# EAGLE board wio_shield (EAGLE 7.6.0)
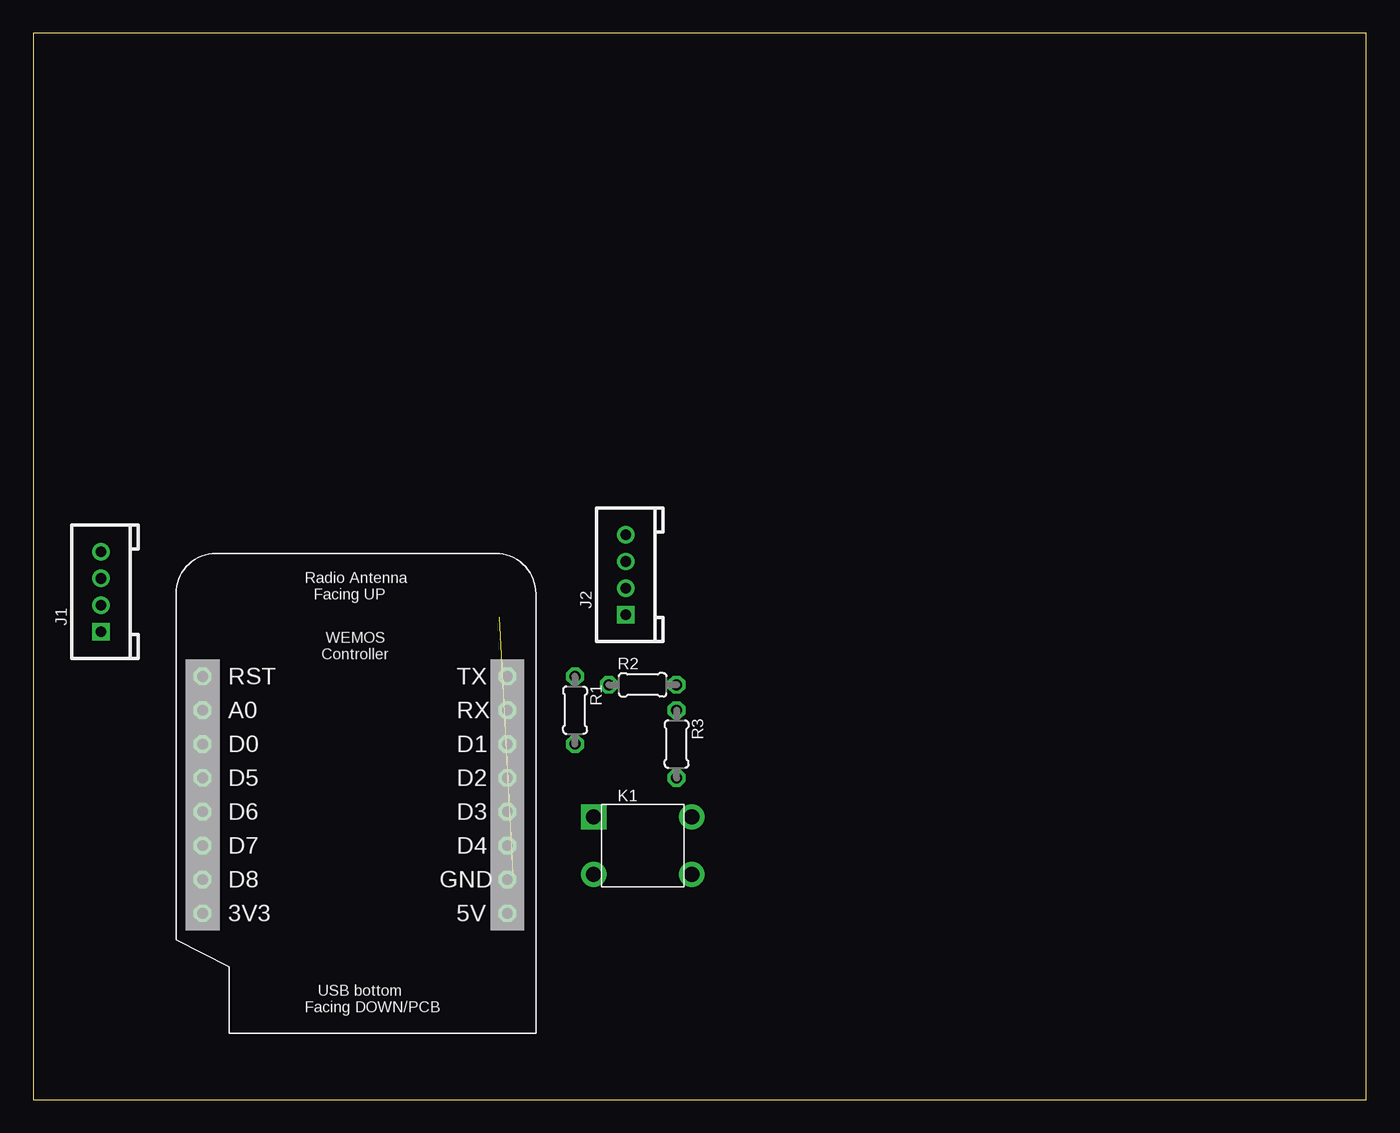
[diagram p0: board, top side]
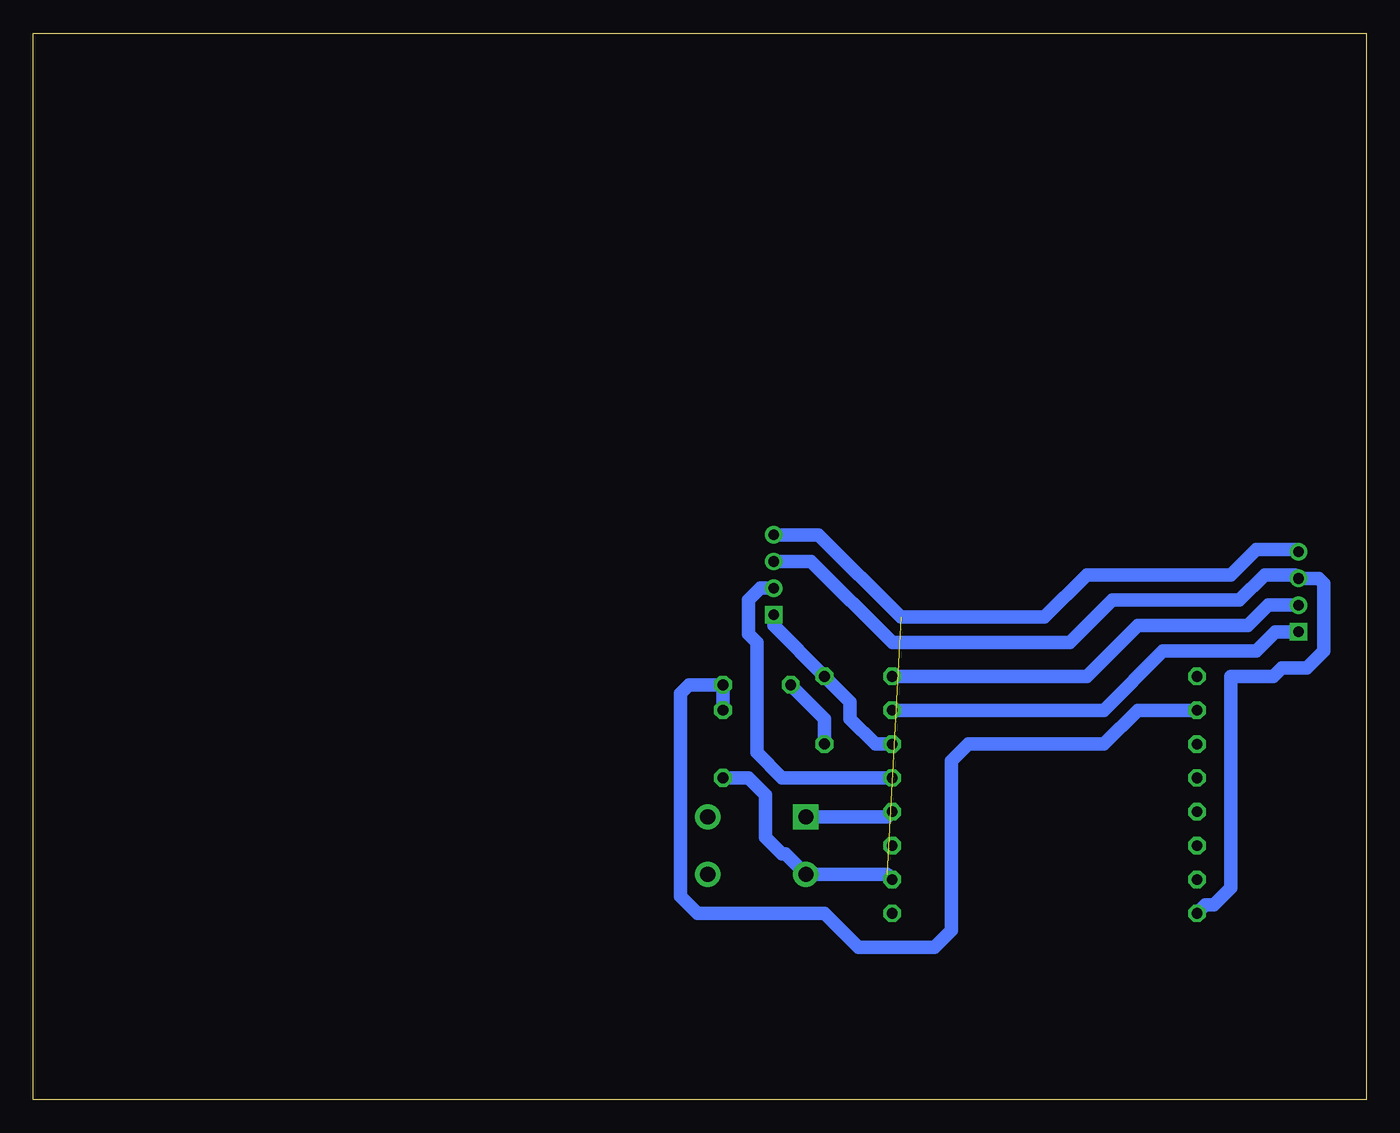
[diagram p1: board, bottom side, seen from below]

Size 100 x 80 mm. Coordinates in mm from the lower left corner, seen from the top.
Outline: 0,0 100,0 100,80 0,80 0,0
Copper layers (1*16): Top 0.035mm / dielectric 1.5mm / Bottom 0.035mm
Design rules "default": minimum track width 10mil, minimum drill 24mil, track to track 8mil, track to pad 8mil, pad to pad 8mil, via to via 8mil, smd to smd 8mil, copper to edge 40mil, drill to drill 8mil, minimum pad ring 10mil, minimum via ring 8mil, stop-mask expansion 4mil, vias tented up to drill 0mil, thermal gap 10mil

## Footprints (pad centres in the part's own frame; a part is rotated, then mirrored left to right if it is on the bottom)
HW4-2.0 = drill 0.8 pad 1.27 square: 1 -3,0 | drill 0.8 pad 1.27: 2 -1,0; 3 1,0; 4 3,0
SW4-6.0X6.0X5.0MM = drill 1.143 pad 1.905 square: 1 -3.683,2.159 | drill 1.143 pad 1.905: 2 -3.683,-2.159; 3 3.683,-2.159; 4 3.683,2.159
PR-D1.8*L3.3MM = drill 0.813 octagon: 5 -2.54,0; 6 2.54,0
WEMOS = drill 0.8 octagon: 3V3 0,0; 5V 22.86,0; A0 0,15.24; D0 0,12.7; D1 22.86,12.7; D2 22.86,10.16; D3 22.86,7.62; D4 22.86,5.08; D5 0,10.16; D6 0,7.62; D7 0,5.08; D8 0,2.54; GND 22.86,2.54; RST 0,17.78; RX 22.86,15.24; TX 22.86,17.78

## Placement (x,y rotation side)
J1  4P-2.0  [HW4-2.0]  5.08,38.1 90 top
J2  4P-2.0  [HW4-2.0]  44.45,39.37 90 top
K1  TS-1109  [SW4-6.0X6.0X5.0MM]  45.72,19.05 0 top
R1  100K  [PR-D1.8*L3.3MM]  40.64,29.21 270 top
R2  100K  [PR-D1.8*L3.3MM]  45.72,31.11 0 top
R3  100K  [PR-D1.8*L3.3MM]  48.26,26.67 270 top
U$1  WEMOS  [WEMOS]  12.7,13.97 0 top

## Library data of the parts
J1 J2 = Seeed-Connector -2016
K1 = Seeed-OPL-Button; MPN: TS-1109
R1-R3 = Seeed-OPL-Resistor; MPN: FHCFR-1/6W-104J--
U$1 = 1455413453956-wemos

## Nets
3.3V: J1.3 J2.3 U$1.3V3
A0: R2.6 R3.5 U$1.A0
GND: J1.4 J2.4 K1.2 R3.6 U$1.GND
GPIO4: J2.2 U$1.D2
GPIO5: J2.1 R1.5 U$1.D1
N$1: R1.6 R2.5
N$2: K1.1 U$1.D3
RX: J1.1 U$1.RX
TX: J1.2 U$1.TX

## Tracks (layer width: path | path; a pad name or v marks a point on that pad's centre or on a via)
3.3V
  Bottom 1.016: U$1.3V3 12.06,14.61 11.43,14.61 10.16,15.88 10.16,31.75 6.99,31.75 6.35,32.38 4.45,32.38 3.17,33.66 3.17,38.73 3.54,39.1 J1.3 5.35,39.37 7.62,39.37 9.53,37.47 19.05,37.47 22.23,34.29 35.56,34.29 41.64,40.37 J2.3
A0
  Bottom 1.016: R3.5 R2.6 50.8,31.11 51.44,30.48 51.44,15.24 50.16,13.97 40.64,13.97 38.1,11.43 32.38,11.43 31.11,12.7 31.11,25.4 29.84,26.67 19.68,26.67 17.14,29.21 U$1.A0
GND  (1 unrouted)
  Bottom 1.016: J2.4 41.1,42.37 34.92,36.2 24.13,36.2 20.95,39.37 10.16,39.37 8.26,41.27 5.25,41.27 J1.4 | U$1.GND 35.94,16.89 K1.2 43.56,18.41 43.81,18.41 45.09,19.68 45.09,22.86 46.35,24.13 R3.6
GPIO4
  Bottom 1.016: J2.2 45.45,38.37 46.35,37.47 46.35,34.92 45.72,34.29 45.72,26.04 43.81,24.13 U$1.D2
GPIO5
  Bottom 1.016: J2.1 44.45,35.56 R1.5 38.73,29.84 38.73,28.57 36.83,26.67 U$1.D1
N$1
  Bottom 1.016: R1.6 40.64,28.57 R2.5
N$2
  Bottom 1.016: K1.1 35.94,21.21 U$1.D3
RX
  Bottom 1.016: J1.1 6.81,35.1 8.26,33.66 15.24,33.66 19.68,29.21 U$1.RX
TX
  Bottom 1.016: J1.2 7.35,37.1 8.89,35.56 17.14,35.56 20.95,31.75 U$1.TX